# Altium PCB SIM-SMD_SMN-303.pcbdoc
Units mm, origin at the board's own origin, x right, y up, seen from the top; angles counter-clockwise.
Board outline 26.7 x 27.74 mm, 2 copper layers (Top Layer, Bottom Layer); 1 components, 0 nets, 11 pads, 0 vias.
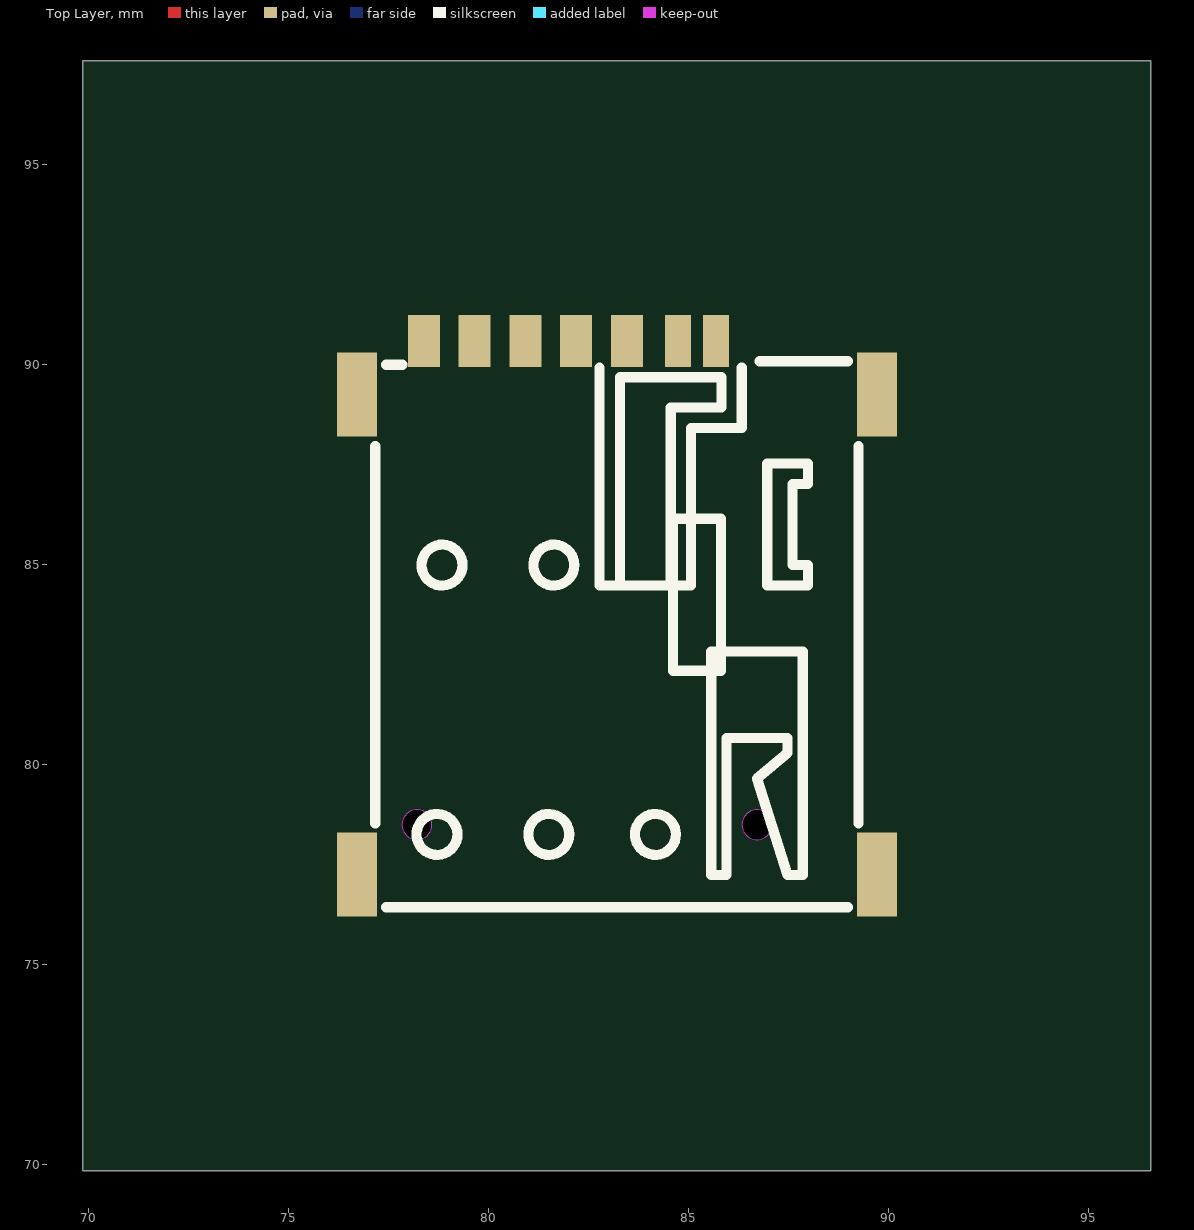
[diagram p0: Top Layer view]
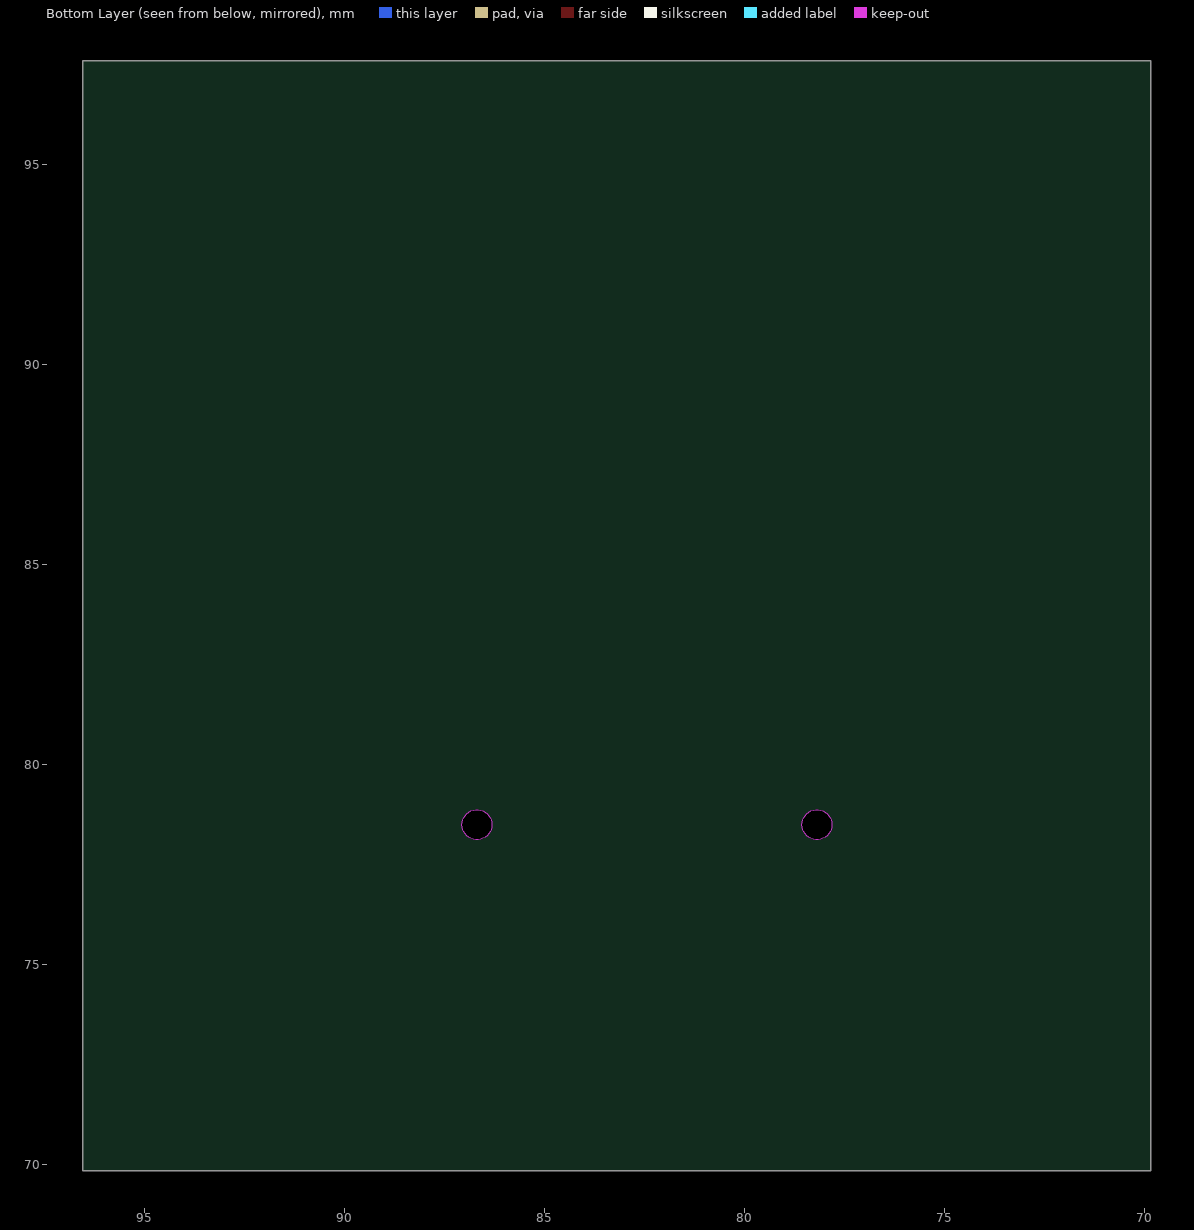
[diagram p1: Bottom Layer view, seen from below]

## Layer stack, top to bottom
Top Layer: signal copper (thickness not stored)
Dielectric: dielectric 0.32, FR-4, Dk 4.8
Bottom Layer: signal copper (thickness not stored)

## Board outline
96.55,69.85 69.85,69.85 69.85,97.594 96.55,97.594

## Components (designator, comment, footprint, x,y, rotation, side; value= is the part's Value field where it differs from the comment)
? "SIM-SMD_SMN-303" SIM-SMD_SMN-303 83.2,83.922 r0 top

## Footprints (in the part's own frame and the unit in brackets; to place one, negate y for a bottom-side part, rotate by r counter-clockwise, add the part's x,y. Pads: shape width x height; smd on the part's side, far side on the other; paste and mask are expansions set on the pad)
SIM-SMD_SMN-303 [mm]
  rect 1x2.1 smd: 8(-6.5,5.328) 9(6.5,5.328) 10(6.5,-6.672) 11(-6.5,-6.672)
  rect 0.8x1.3 smd: C1(0.25,6.672) C2(-2.29,6.672) C3(-4.83,6.672) C6(-1.02,6.672) C7(-3.56,6.672)
  rect 0.65x1.3 smd: C5(1.52,6.672) CD(2.47,6.672)
  Multi-Layer board cut-out: -4.625,-5.422 -4.662,-5.259 -4.766,-5.129 -4.916,-5.057 -5.083,-5.056 -5.234,-5.129 -5.338,-5.259 -5.375,-5.422 -5.375,-5.422 -5.338,-5.585 -5.234,-5.715 -5.083,-5.788 -4.916,-5.788 -4.766,-5.715 -4.662,-5.585 -4.625,-5.422
  Multi-Layer board cut-out: 3.875,-5.422 3.838,-5.259 3.734,-5.129 3.583,-5.057 3.417,-5.056 3.266,-5.129 3.162,-5.259 3.125,-5.422 3.125,-5.422 3.162,-5.585 3.266,-5.715 3.417,-5.788 3.583,-5.788 3.734,-5.715 3.838,-5.585 3.875,-5.422
  Multi-Layer keep-out region: -4.625,-5.422 -4.662,-5.259 -4.766,-5.129 -4.916,-5.057 -5.083,-5.056 -5.234,-5.129 -5.338,-5.259 -5.375,-5.422 -5.375,-5.422 -5.338,-5.585 -5.234,-5.715 -5.083,-5.788 -4.916,-5.788 -4.766,-5.715 -4.662,-5.585 -4.625,-5.422
  Multi-Layer keep-out region: 3.875,-5.422 3.838,-5.259 3.734,-5.129 3.583,-5.057 3.417,-5.056 3.266,-5.129 3.162,-5.259 3.125,-5.422 3.125,-5.422 3.162,-5.585 3.266,-5.715 3.417,-5.788 3.583,-5.788 3.734,-5.715 3.838,-5.585 3.875,-5.422
  silkscreen extent -6.04,-7.49 6.04,6.16

## Nets (pads, with @x,y where several pads share a name; then routed paths per layer and width w, separated by ;. In a path a pad name is that pad's centre, name@x,y a point inside that pad or via, vN(x,y) a via of type N, cw(c..) or ccw(c..) an arc to the next point about the centre after c; other vN are vias at no path point)
pads on no net: ?.8 ?.9 ?.10 ?.11 ?.C1 ?.C2 ?.C3 ?.C5 ?.C6 ?.C7 ?.CD